# EAGLE board VentaConnected_Arduino_V0.01_2017-12-11 (EAGLE 8.3.2)
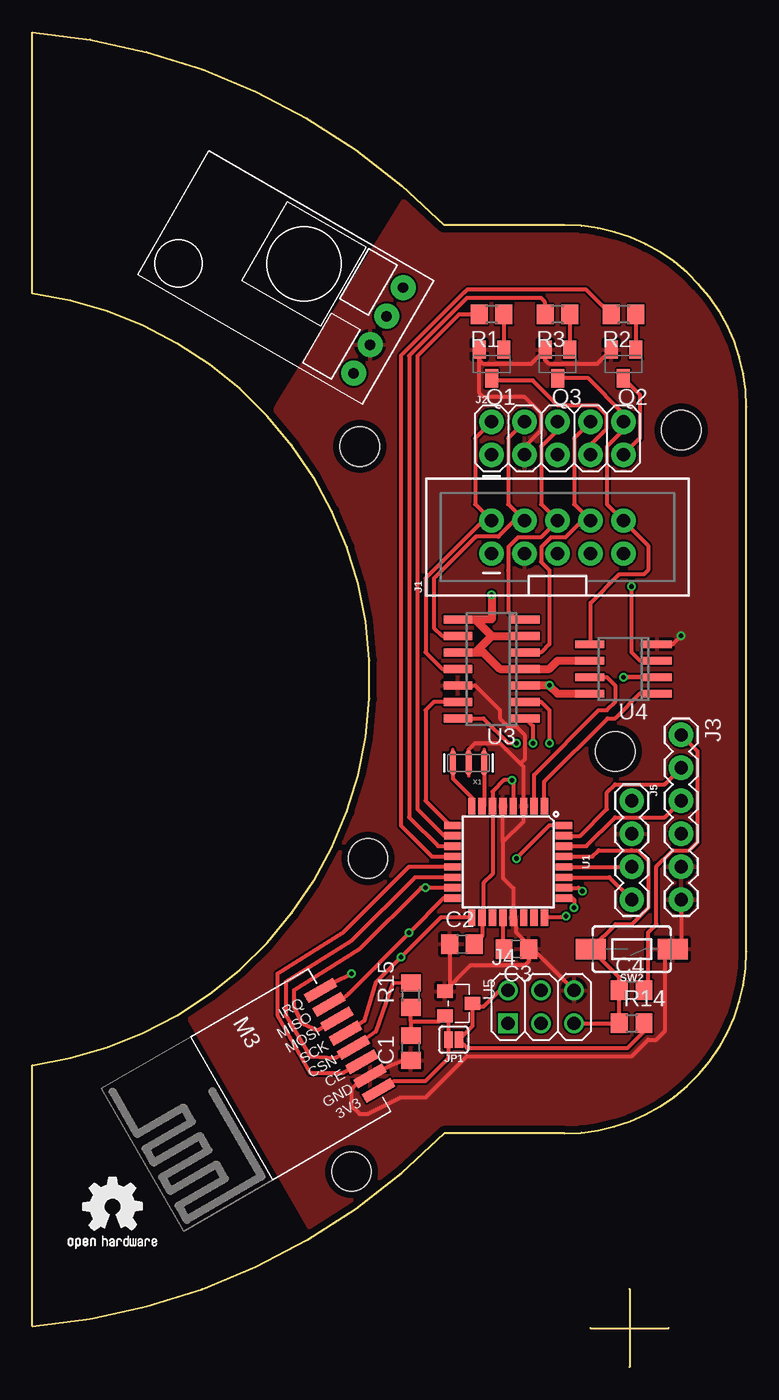
[diagram p0: board, top side]
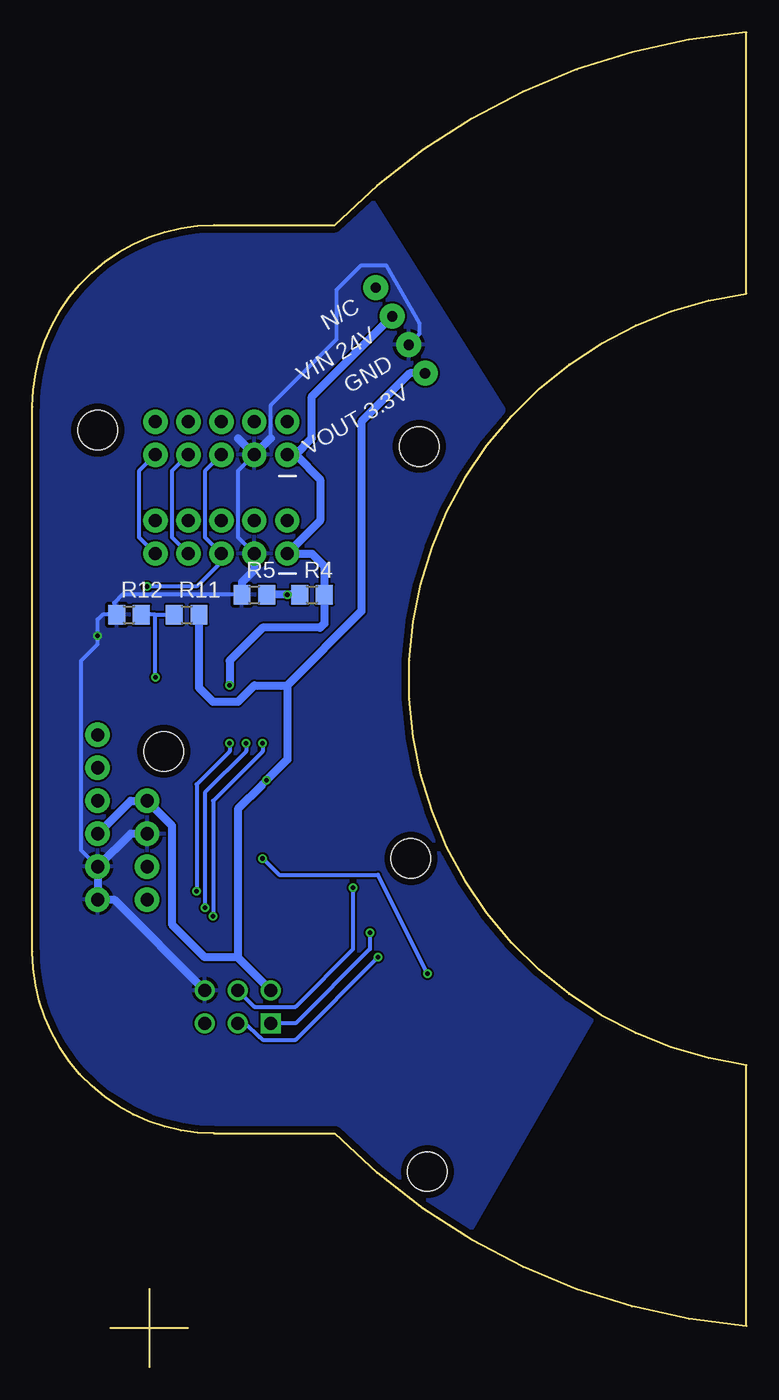
[diagram p1: board, bottom side, seen from below]

Size 55 x 102.85 mm. Coordinates in mm from the lower left corner, seen from the top.
Outline: 46,6 46,0
Outline: 43,3 49,3
Outline: 41,18 arc90 55,32 55,74 arc90 41,88 31.71,88 arc41 0,102.85 0,82.73 arc-165 0,23.27 0,3.16 arc41 31.71,18 41,18
Copper layers (1*16): Top 0.035mm / dielectric 1.6mm / Bottom 0.035mm
Design rules "Elecrow_2-layer_PCB_eagle_rule": minimum track width 6mil, minimum drill 12mil, track to track 6mil, track to pad 6mil, pad to pad 6mil, via to via 8mil, smd to smd 0mil, copper to edge 20mil, drill to drill 10mil, minimum pad ring 6mil, minimum via ring 6mil, stop-mask expansion 0mil, vias tented up to drill 100mil, thermal gap 10mil
Net classes: 0 default: width 0.203 mm; 1 vcc: width 0.254 mm
Holes 3.05 mm at 49.98,72.22 25.21,70.94 44.9,47.45 25.84,39.2 24.57,15.06
tRestrict: area 31.6,45.7 to 35.6,47.5

## Footprints (pad centres in the part's own frame; a part is rotated, then mirrored left to right if it is on the bottom)
C0805 = smd 1.3 x 1.5: 1 -0.95,0; 2 0.95,0
2X5-SHROUDED = drill 1.016 pad 1.88: 1 -1.27,5.08; 2 1.27,5.08; 3 -1.27,2.54; 4 1.27,2.54; 5 -1.27,0; 6 1.27,0; 7 -1.27,-2.54; 8 1.27,-2.54; 9 -1.27,-5.08; 10 1.27,-5.08
2X5 = drill 1.016 pad 1.88: 1 0,0; 2 0,2.54; 3 2.54,0; 4 2.54,2.54; 5 5.08,0; 6 5.08,2.54; 7 7.62,0; 8 7.62,2.54; 9 10.16,0; 10 10.16,2.54
1X06 = drill 1.016 pad 1.88: 1 0,0; 2 2.54,0; 3 5.08,0; 4 7.62,0; 5 10.16,0; 6 12.7,0
2X03 = drill 1.016 square: 1 -2.54,-1.27 | drill 1.016: 2 -2.54,1.27; 3 0,-1.27; 4 0,1.27; 5 2.54,-1.27; 6 2.54,1.27
1X04 = drill 1.016 pad 1.88: 1 0,0; 2 2.54,0; 3 5.08,0; 4 7.62,0
SMT-JUMPER_2_NO_SILK = smd 0.635 x 1.27: 1 -0.406,0; 2 0.406,0
WIRELESS-NRF24L01-SMD = smd 2.54 x 0.762: 1 1.27,0; 2 1.27,1.27; 3 1.27,2.54; 4 1.27,3.81; 5 1.27,5.08; 6 1.27,6.35; 7 1.27,7.62; 8 1.27,8.89
SOT23-BEC = smd 1 x 1.4: B -0.95,-1.1; C 0,1.1; E 0.95,-1.1
R0805 = smd 1.3 x 1.5: 1 -0.95,0; 2 0.95,0
TACTILE_SWITCH_SMD_6.0X3.5MM = smd 2.3 x 1.6: 1 -3.15,0; 2 3.15,0
TQFP32-08 = smd 1.27 x 0.559: 1 -4.293,2.8; 2 -4.293,2; 3 -4.293,1.2; 4 -4.293,0.4; 5 -4.293,-0.4; 6 -4.293,-1.2; 7 -4.293,-2; 8 -4.293,-2.8; 17 4.293,-2.8; 18 4.293,-2; 19 4.293,-1.2; 20 4.293,-0.4; 21 4.293,0.4; 22 4.293,1.2; 23 4.293,2; 24 4.293,2.8 | smd 0.559 x 1.27: 9 -2.8,-4.293; 10 -2,-4.293; 11 -1.2,-4.293; 12 -0.4,-4.293; 13 0.4,-4.293; 14 1.2,-4.293; 15 2,-4.293; 16 2.8,-4.293; 25 2.8,4.293; 26 2,4.293; 27 1.2,4.293; 28 0.4,4.293; 29 -0.4,4.293; 30 -1.2,4.293; 31 -2,4.293; 32 -2.8,4.293
MINI_BUCK_CONVERTER_UPDOWN = drill 0.8 pad 1.93: EN -1.27,1.27; GND -6.35,1.27; IN+ -3.81,1.27; VO+ -8.89,1.27
SO14 = smd 0.6 x 2.2: 1 -3.81,-2.6; 2 -2.54,-2.6; 3 -1.27,-2.6; 4 0,-2.6; 5 1.27,-2.6; 6 2.54,-2.6; 7 3.81,-2.6; 8 3.81,2.6; 9 2.54,2.6; 10 1.27,2.6; 11 0,2.6; 12 -1.27,2.6; 13 -2.54,2.6; 14 -3.81,2.6
SO08 = smd 0.6 x 2.2: 1 -1.905,-2.6; 2 -0.635,-2.6; 3 0.635,-2.6; 4 1.905,-2.6; 5 1.905,2.6; 6 0.635,2.6; 7 -0.635,2.6; 8 -1.905,2.6
SOT-23 = smd 1.016 x 1.2: 1 -0.95,-1.06; 2 0.95,-1.06; 3 0,1.06
RESONATOR-SMD-1:1 = smd 0.45 x 1.905: 1 -1.2,0; 2 0,0; 3 1.2,0

## Placement (x,y rotation side)
C1  10uF  [C0805]  29.15,24.59 90 top
C2  0.1uF  [C0805]  33.08,32.59 0 top
C3  0.1uF  [C0805]  37.27,32.21 180 top
C4  0.1uF  [C0805]  46.16,29.04 0 top
GOLD_ORB_SM1  OSHWLOGO_GOLD_ORB_SM  [OSHW2]  2.35,8.08 0 top
J1  Panel  [2X5-SHROUDED]  40.45,63.96 90 top
J2  Main Board  [2X5]  35.37,70.31 0 top
J3  FTDI Basic  [1X06]  49.98,48.72 270 top
J4  ICSP  [2X03]  39.18,27.77 0 top
J5  I2C  [1X04]  46.16,43.64 270 top
JP1  3.3V No regulator  [SMT-JUMPER_2_NO_SILK]  32.45,25.23 180 top
M3  NRF24L01+  [WIRELESS-NRF24L01-SMD]  23.3,29.67 210 top
Q1  2N4401  [SOT23-BEC]  35.37,77.3 180 top
Q2  2N4401  [SOT23-BEC]  45.53,77.3 180 top
Q3  2N4401  [SOT23-BEC]  40.45,77.3 180 top
R1  4,7k  [R0805]  35.37,81.11 180 top
R2  47k  [R0805]  45.53,81.11 180 top
R3  47k  [R0805]  40.45,81.11 180 top
R4  1M  [R0805]  33.47,59.52 0 bottom
R5  1M  [R0805]  37.91,59.52 0 bottom
R11  1M  [R0805]  43.12,57.99 0 bottom
R12  1M  [R0805]  47.56,57.99 0 bottom
R14  10K  [R0805]  46.16,26.5 0 top
R15  56k  [R0805]  29.15,28.65 90 top
SW2  RST  [TACTILE_SWITCH_SMD_6.0X3.5MM]  46.16,32.21 180 top
U1  ATMEGA328P_TQFP  [TQFP32-08]  36.64,38.94 270 top
U2  MINI_BUCK_CONVERTER_UPSIDEDOWN  [MINI_BUCK_CONVERTER_UPDOWN]  30.29,83.64 60 top
U3  LM339  [SO14]  35.37,53.8 90 top
U4  LM393  [SO08]  45.53,53.8 90 top
U5  XC6206P332MR  [SOT-23]  32.83,28.02 270 top
X1  8/16/20MHz  [RESONATOR-SMD-1:1]  33.59,46.56 180 top

## Library data of the parts
C1 R14 R15 = rcl
C2-C4 R1-R5 R11 R12 = resistor
GOLD_ORB_SM1 = bfl
J1 = opentools; PROD_ID: CONN-08671; SF_ID: PRT-08506
J2 = opentools; PROD_ID: CONN-08499; SF_ID: PRT-0778
J3 = SparkFun
J4 = analyzer
J5 = SparkFun-Connectors; PROD_ID: CONN-09696
JP1 = SparkFun-Jumpers
M3 = nrf24l01plus
Q1-Q3 = transistor-neu-to92
SW2 = SparkFun-Switches; PROD_ID: SWCH-00815; SF_SKU: COM-08229
U1 = SparkFun-IC-Microcontroller; PROD_ID: IC-09069
U2 = opentools
U3 U4 = linear
U5 = Seeed-IC; MPN: XC6206P332MR-G
X1 = Testing

## Nets
A0: U1.23
A6: U1.19
A7: U1.22
AREF: C3.2 U1.20
BTN_OPEN: J1.5 J2.5 U4.3
BTN_PWR: J1.7 J2.7 Q1.C
BTN_UD: J1.9 J2.9 Q2.C
D2: M3.1 U1.32
DTR: C4.2 J3.1
GND: C1.1 C2.1 C3.1 J1.3 J2.3 J3.5 J3.6 J4.6 J5.2 M3.7 Q1.E Q2.E Q3.E R5.1 R12.1 SW2.1 U1.3 U1.5 U1.21 U2.GND U3.12 U4.4 U5.1 X1.2
LED_1: J1.4 J2.4 U3.9
LED_2: J1.6 J2.6 U3.7
LED_3: J1.8 J2.8 U3.5
LED_ERR: J1.10 J2.10 Q3.C U4.5
LED_ON: J1.2 J2.2 U3.11
MISO: J4.1 M3.2 U1.16
MOSI: J4.4 M3.3 U1.15
N$2: Q1.B R1.1
N$5: Q3.B R3.1
N$6: Q2.B R2.1
N$12: U1.8 X1.3
N$13: U1.7 X1.1
NRF_CE: M3.6 U1.13
NRF_CSN: M3.5 R15.2 U1.14
PIN_1: U1.24 U3.14
PIN_2: U1.25 U3.1
PIN_3: U1.26 U3.2
PIN_ERR: U1.2 U4.7
PIN_ERRLED: R3.2 U1.11
PIN_ON: U1.9 U3.13
PIN_OPEN: U1.1 U4.1
PIN_PWR: R1.2 U1.10
PIN_UD: R2.2 U1.12
RESET: C4.1 J4.5 R14.1 SW2.2 U1.29
RXI: J3.3 U1.30
SCK: J4.3 M3.4 U1.17
SCL: J5.3 U1.28
SDA: J5.4 U1.27
TXO: J3.2 U1.31
VCC_2.5V: R11.1 R12.2 U4.2
VCC_3.3V: C1.2 JP1.2 M3.8 R15.1 U5.2
VCC_5V: C2.2 J3.4 J4.2 J5.1 JP1.1 R11.2 R14.2 U1.4 U1.6 U1.18 U2.VO+ U5.3
VCC_12V: R4.1 R5.2 U3.4 U3.6 U3.8 U3.10 U4.6
VCC_24V: J1.1 J2.1 R4.2 U2.IN+ U3.3 U4.8

## Tracks (layer width: path | path; a pad name or v marks a point on that pad's centre or on a via)
AREF
  Top 0.305: U1.20 36.24,32.3 C3.2
BTN_OPEN  (via drill 0.35)
  Top 0.305: U4.3 46.8,54.44 46.16,55.07 v46.16,60.15
  Bottom 0.305: J2.5 41.72,69.04 41.72,63.96 J1.5 40.45,62.05 42.35,60.15 v46.16,60.15
BTN_PWR
  Top 0.305: Q1.C 35.54,76.03 38.55,76.03 40.48,74.09 43.51,74.09 44.23,73.37 44.23,72.33 42.99,71.09 J2.7
  Bottom 0.305: J2.7 44.26,69.04 44.26,63.96 J1.7
BTN_UD
  Top 0.305: 45.53,76.03 Q2.C 46.8,74.92 46.8,71.58 J2.9
  Bottom 0.305: J2.9 46.8,69.04 46.8,63.96 J1.9
D2  (via drill 0.35)
  Top 0.305: M3.1 23.3,29.67 v24.57,30.3 | U1.32 39.82,41.74 v37.27,39.2
  Bottom 0.305: v24.57,30.3 28.38,37.92 36.01,37.92 v37.27,39.2
DTR
  Top 0.305: J3.1 51.24,47.45 51.24,40.47 50.61,39.83 49.34,39.83 48.07,38.56 48.07,34.11 47.44,33.48 47.44,29.36 C4.2
GND  (via drill 0.35)
  Top 0.203: 26.15,22.56 M3.7 | 49.87,32.06 SW2.1 | 29.07,23.7 C1.1
  Top 0.305: J3.6 49.98,32.87 SW2.1 48.7,31.6 48.7,25.86 48.07,25.23 47.44,25.23 46.16,23.95 33.47,23.95 30.29,20.78 28.38,20.78 25.84,19.51 25.21,19.51 24.57,20.14 24.57,21.41 25.6,22.44 M3.7 27.75,23.32 28.77,23.7 29.07,23.7 | C3.1 38.55,32.21 J4.6 | C3.1 38.23,32.53 37.27,33.48 37.27,33.87 37.26,33.89 37.26,34.43 U1.21 37.04,36.89 36.24,37.69 36.24,40.47 | C3.1 38.23,31.25 37.91,30.94 33.74,30.94 U5.1 32.13,29.33 C2.1 | 36.24,40.47 U1.5 | Q2.E 43.48,77.3 39.81,77.3 39.5,77.61 Q3.E 38.4,77.3 34.73,77.3 34.42,77.61 | 34.42,77.61 Q1.E | J2.3 37.91,70.94 39.18,72.22 39.18,73.48 37.91,74.75 34.73,74.75 34.42,75.07 34.42,77.61 | C1.1 29.15,23.61 28.93,23.39 | 36.24,40.47 37.84,42.06 U1.3 37.84,46.25 37.59,46.5 | 37.59,46.5 36.46,47.63 36.45,47.63 35.99,48.09 34.1,48.09 33.59,47.58 X1.2 | U3.12 34.1,52.53 36.01,50.62 36.01,49.99 36.64,49.35 37.27,49.35 37.91,48.72 37.91,46.81 37.59,46.5 | v49.98,56.34 49.34,55.7 U4.4
  Bottom 0.305: J2.3 39.18,69.04 39.18,63.96 J1.3 | R5.1 48.07,59.52 48.7,58.88 48.7,58.18 R12.1 49.59,57.99 49.98,57.61 v49.98,56.34 49.98,55.7 51.24,54.44 51.24,39.83 J3.5 | 36.64,71.58 36.64,74.12 31.56,79.2 31.56,83.01 29.66,84.92 27.75,84.92 25.21,80.47 25.21,79.59 U2.GND
  Bottom 0.61: J1.3 37.91,61.42 38.86,60.47 R5.1 | 39.18,71.58 J2.3 36.64,71.58 | J5.2 47.44,41.1 J3.5 J3.6 48.7,36.02 J4.6
  pour Top: 29.02,90.63 18.86,74.12 18.23,72.85 22.04,67.14 24.57,62.05 25.84,53.8 25.21,49.99 22.04,38.56 11.88,27.13 21.4,10.62 31.56,17.61 42.99,17.61 52.52,23.32 55.69,33.48 55.69,74.12 51.88,84.28 42.99,88.09 31.56,88.09
  pour Bottom: 29.02,90.25 18.23,73.1 20.13,69.93 23.94,62.31 25.84,55.32 25.21,49.61 22.04,37.54 11.88,26.75 21.4,10.24 32.83,18.49 44.26,18.49 52.52,23.57 55.69,33.1 55.69,73.74 51.88,83.9 42.99,87.71 31.56,87.71
LED_1
  Top 0.305: J2.4 36.64,71.58 36.64,66.5 J1.4 37.13,65.23 35.89,63.98 34.14,63.98 34.11,63.95 | 34.11,63.95 34.11,63.96 | 34.11,63.95 30.93,60.78 30.93,56.97 31.56,56.34 U3.9
LED_2
  Top 0.305: 36.64,61.42 36.66,61.45 | 36.66,61.45 36.66,63.21 37.39,63.94 39.16,63.94 J1.6 39.18,66.5 39.18,70.94 40.45,72.22 J2.6 | 36.66,61.45 36.66,58.22 37.27,57.61 U3.7
LED_3
  Top 0.305: J2.8 41.72,71.58 41.72,66.5 J1.8 42.35,65.23 41.06,63.94 39.93,63.94 39.2,63.21 39.2,62.08 39.18,62.05 39.81,61.42 39.81,55.7 39.18,55.07 U3.5
LED_ERR
  Top 0.305: Q3.C 42.82,76.19 45.53,73.48 J2.10 45.53,72.22 44.26,70.94 44.26,66.5 J1.10 47.44,63.33 47.44,61.42 47.12,61.1 45.21,61.1 42.99,58.88 42.99,55.77 U4.5
LED_ON
  Top 0.305: J2.2 34.1,71.58 34.1,66.5 J1.2 34.73,65.23 30.29,60.78 30.29,55.07 31.56,53.8 U3.11
MISO  (via drill 0.35)
  Top 0.305: M3.2 23.94,28.4 24.35,28.77 v29.01,33.47 31.68,36.14 U1.16
  Bottom 0.305: J4.1 34.73,26.5 29.01,32.22 v29.01,33.47
MOSI  (via drill 0.35)
  Top 0.305: U1.15 v30.29,36.94 29.94,36.94 25.21,32.21 20.13,29.04 20.13,27.77 20.77,26.5 21.98,25.95 M3.3
  Bottom 0.305: J4.4 37.91,27.77 34.73,27.77 30.29,32.21 30.29,36.63 | 30.29,36.63 | v30.29,36.94 30.29,36.63
N$2
  Top 0.305: R1.1 Q1.B
N$5
  Top 0.305: R3.1 Q3.B
N$6
  Top 0.305: R2.1 Q2.B
N$12
  Top 0.305: X1.3 32.39,45.35 33.84,43.9 U1.8
N$13
  Top 0.305: X1.1 34.79,43.23 U1.7
NRF_CE
  Top 0.305: U1.13 29,38.54 23.94,33.48 18.86,30.3 18.86,27.13 21.4,22.68 23.94,22.68 M3.6
NRF_CSN
  Top 0.203: 29.02,29.57 29.07,29.57 R15.2
  Top 0.305: 29.02,29.57 29.02,29.67 27.8,29.62 26.48,25.86 M3.5 23.37,23.84 21.4,23.95 19.5,27.13 19.5,29.67 24.57,32.84 29.47,37.74 U1.14
PIN_1  (via drill 0.35)
  Top 0.305: U3.14 34.73,49.99 36.64,48.09 v37.27,48.09 | v41.09,34.75 40.98,34.65 U1.24
  Bottom 0.305: v41.09,34.75 41.09,43.64 37.27,47.45 v37.27,48.09
PIN_2  (via drill 0.35)
  Top 0.305: U3.1 38.55,49.41 v38.55,48.09 | U1.25 41.6,36.14 41.72,36.02 v41.72,35.38
  Bottom 0.305: v41.72,35.38 41.72,44.27 38.55,47.45 v38.55,48.09
PIN_3  (via drill 0.35)
  Top 0.305: U3.2 39.18,51.26 39.81,50.62 v39.81,48.09 | U1.26 42.07,36.94 v42.35,36.66
  Bottom 0.305: v42.35,36.66 42.35,44.91 39.81,47.45 v39.81,48.09
PIN_ERR
  Top 0.305: U4.7 44.26,53.16 44.9,52.53 44.9,51.26 44.26,50.62 43.62,50.62 38.64,45.64 U1.2
PIN_ERRLED
  Top 0.305: R3.2 39.5,82.06 39.18,82.38 33.47,82.38 29.02,77.93 29.02,42.37 31.25,40.14 U1.11
PIN_ON
  Top 0.305: U3.13 30.92,51.26 30.29,50.62 30.29,43.64 32.19,41.74 U1.9
PIN_OPEN
  Top 0.305: U4.1 46.8,51.9 44.9,49.99 44.32,49.99 39.44,45.11 U1.1
PIN_PWR
  Top 0.305: R1.2 32.84,81.11 29.66,77.92 29.66,70.32 29.66,70.31 29.66,43.01 31.72,40.94 U1.10
PIN_UD
  Top 0.305: R2.2 42.67,83.01 33.47,83.01 33.29,82.83 33.28,82.83 28.56,78.12 28.56,78.11 28.38,77.93 28.38,41.73 30.78,39.34 U1.12
RESET
  Top 0.305: U1.29 43.14,39.34 43.62,39.83 46.16,39.83 46.19,39.8 46.68,39.8 47.44,39.05 47.44,35.38 46.16,34.11 44.92,34.11 SW2.2 45.22,30.01 C4.1 R14.1 J4.5
RXI
  Top 0.305: U1.30 42.67,40.14 44.9,42.37 48.7,42.37 J3.3
SCK  (via drill 0.35)
  Top 0.305: U1.17 31.46,34.65 v28.38,31.57 26.48,29.67 25.59,26.7 M3.4
  Bottom 0.305: J4.3 38.59,26.5 37.53,25.43 37.48,25.43 37.27,25.23 34.73,25.23 v28.38,31.57
SCL
  Top 0.305: U1.28 46.15,38.54 J5.3
SDA
  Top 0.305: U1.27 44.44,37.74 J5.4
TXO
  Top 0.305: U1.31 42.2,40.94 44.26,43.01 44.26,44.27 44.9,44.91 48.7,44.91 J3.2
VCC_2.5V  (via drill 0.35)
  Top 0.305: 48.07,53.16 v45.53,53.16 U4.2
  Bottom 0.305: 45.53,57.99 R11.1 | 45.53,57.99 R12.2 | v45.53,53.16 45.53,57.99
VCC_3.3V
  Top 0.203: 29.07,25.48 28.89,25.3 | 26.68,21.49 M3.8
  Top 0.305: 29.15,26.62 C1.2 29.13,25.54 29.07,25.48 | 29.15,26.62 R15.1 | 29.15,26.62 31.32,26.62 U5.2 32.04,26.8 JP1.2 32.04,23.8 30.29,22.05 27.89,22.05 M3.8
VCC_5V  (via drill 0.35)
  Top 0.305: J4.2 36.01,29.04 34.73,27.77 34.14,27.77 U5.3 33.89,26.26 JP1.1 33.49,24.59 45.84,24.59 47.12,25.86 R14.2 | C2.2 34.64,33.2 U1.18 34.73,34.74 34.73,37.29 35.44,37.99 35.44,43.01 U1.6 35.44,44.34 36.32,45.23 v36.96,45.23 37.04,45.15 U1.4
  Bottom 0.305: 37.27,44.91 v36.96,45.23
  Bottom 0.61: U2.VO+ 25.92,76.58 29.66,72.85 29.66,58.24 35.37,52.53 | 35.37,52.53 37.91,52.53 39.18,51.26 41.09,51.26 42.17,52.34 R11.2 | J3.4 47.44,43.64 J5.1 44.26,41.73 44.26,34.11 41.72,31.57 39.18,31.57 | 39.18,31.57 J4.2 | v36.96,45.23 35.37,46.81 35.37,52.53 | 37.27,44.91 39.18,43.01 39.18,31.57
VCC_12V  (via drill 0.35)
  Top 0.305: 34.1,55.07 34.73,55.07 | 37.91,53.8 U3.4 | 32.83,57.61 35.37,57.61
  Top 0.61: v35.37,59.52 35.37,57.61 U3.8 34.1,57.61 35.37,56.34 | 35.37,56.34 U3.6 | 35.37,56.34 34.1,55.07 U3.10 34.73,55.07 36.01,53.8 37.91,53.8 | U3.4 39.81,53.8 40.45,54.44 U4.6
  Bottom 0.61: R4.1 v35.37,59.52 R5.2
VCC_24V  (via drill 0.35)
  Top 0.305: U4.8 41.72,51.9
  Top 0.61: U3.3 v39.81,52.53 40.45,51.9 U4.8
  Bottom 0.61: 34.73,70.31 J2.1 34.73,70.31 | 34.73,70.31 33.47,71.58 33.47,74.8 U2.IN+ | v39.81,52.53 39.81,54.44 37.27,56.98 32.83,56.98 32.52,57.29 R4.2 32.52,61.74 33.47,62.69 J1.1 32.83,65.23 32.83,68.41 34.73,70.31

## Text on the board
bOrigins: VentaConnected for atmega / R. Kainhofer / Version 0.001, 14. 11.2017
bNames: N/C / VIN 24V / GND / VOUT 3.3V